# EAGLE board daughterboard (EAGLE 9.6.2), part 1 of 2
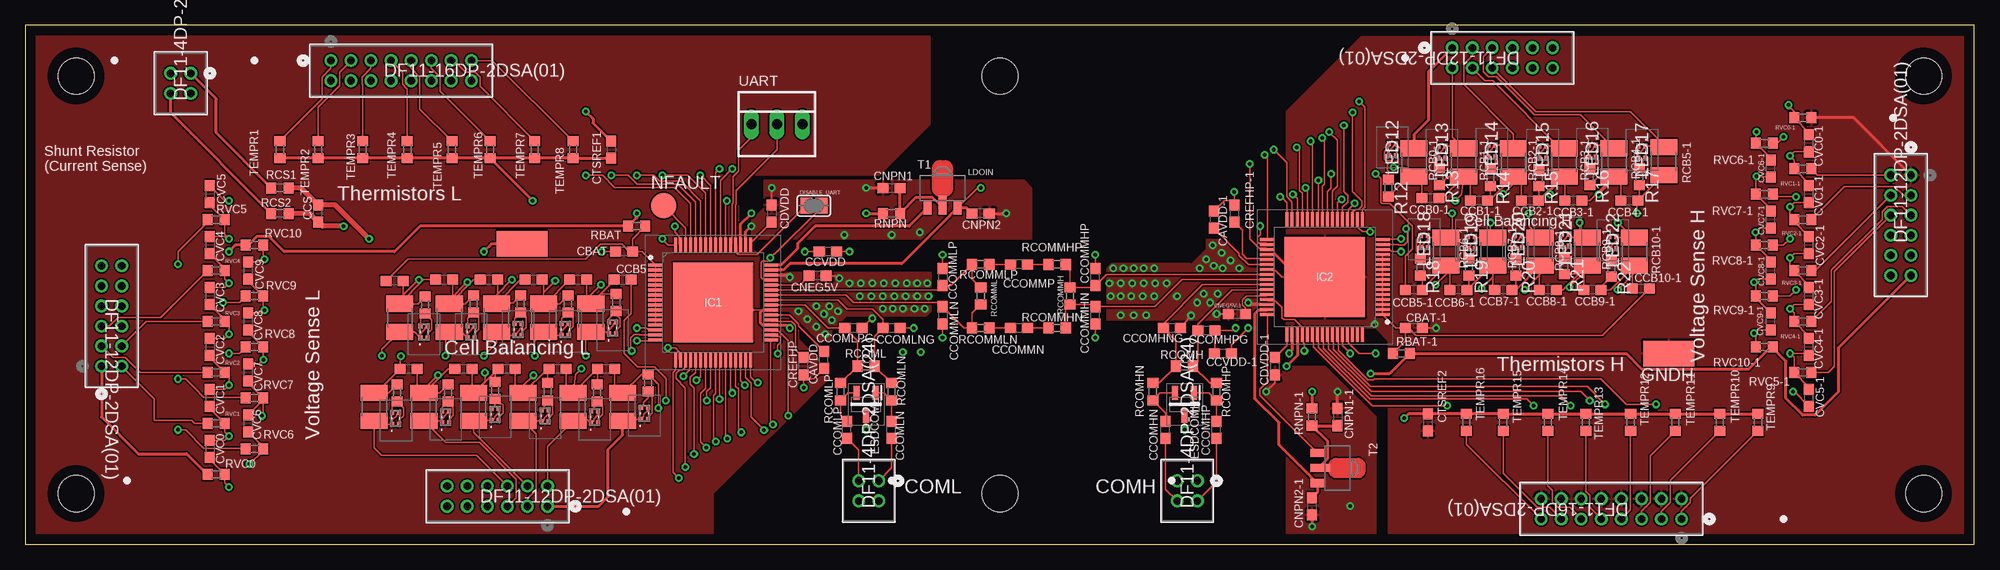
[diagram p0: board, top side]
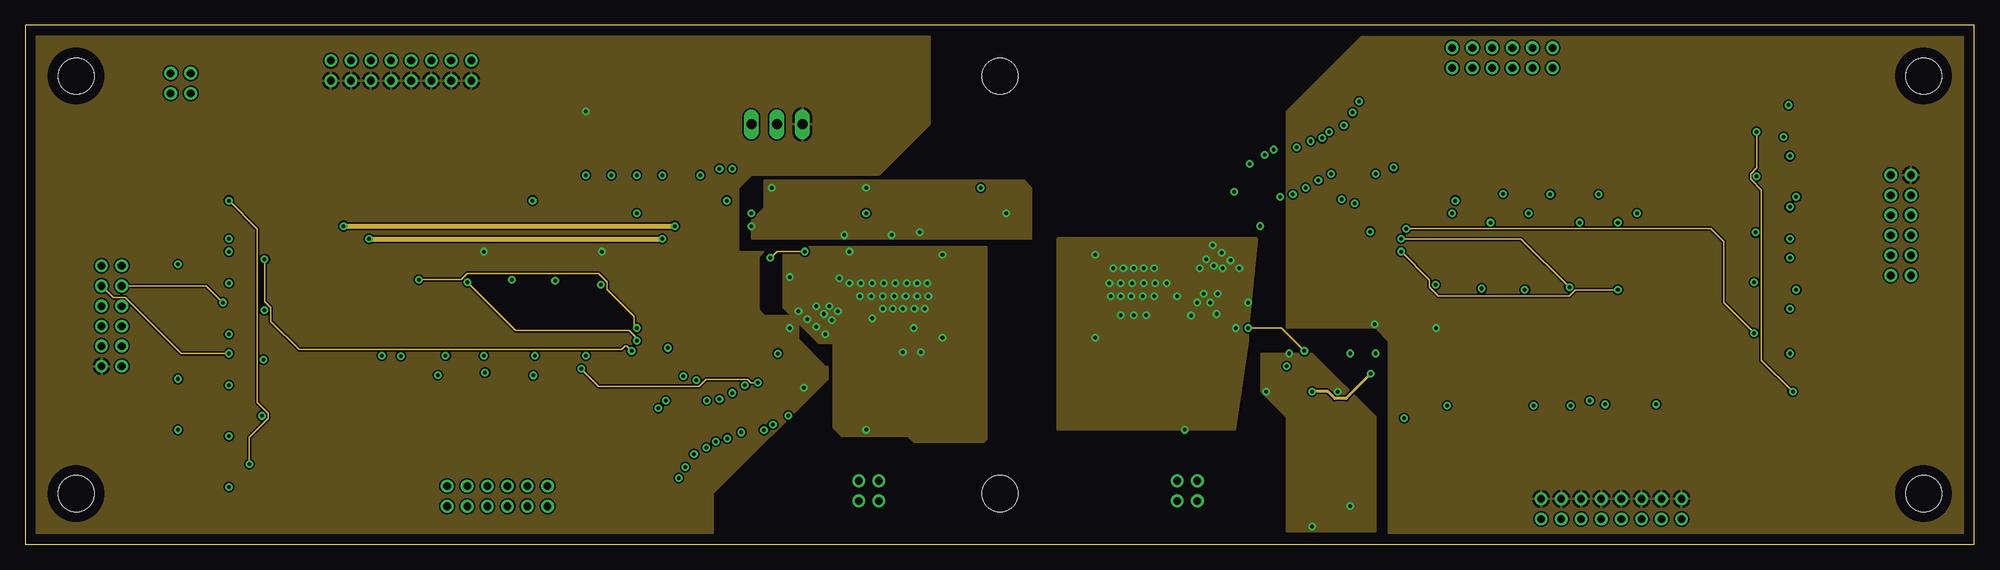
[diagram p1: board, inner layer Route2]
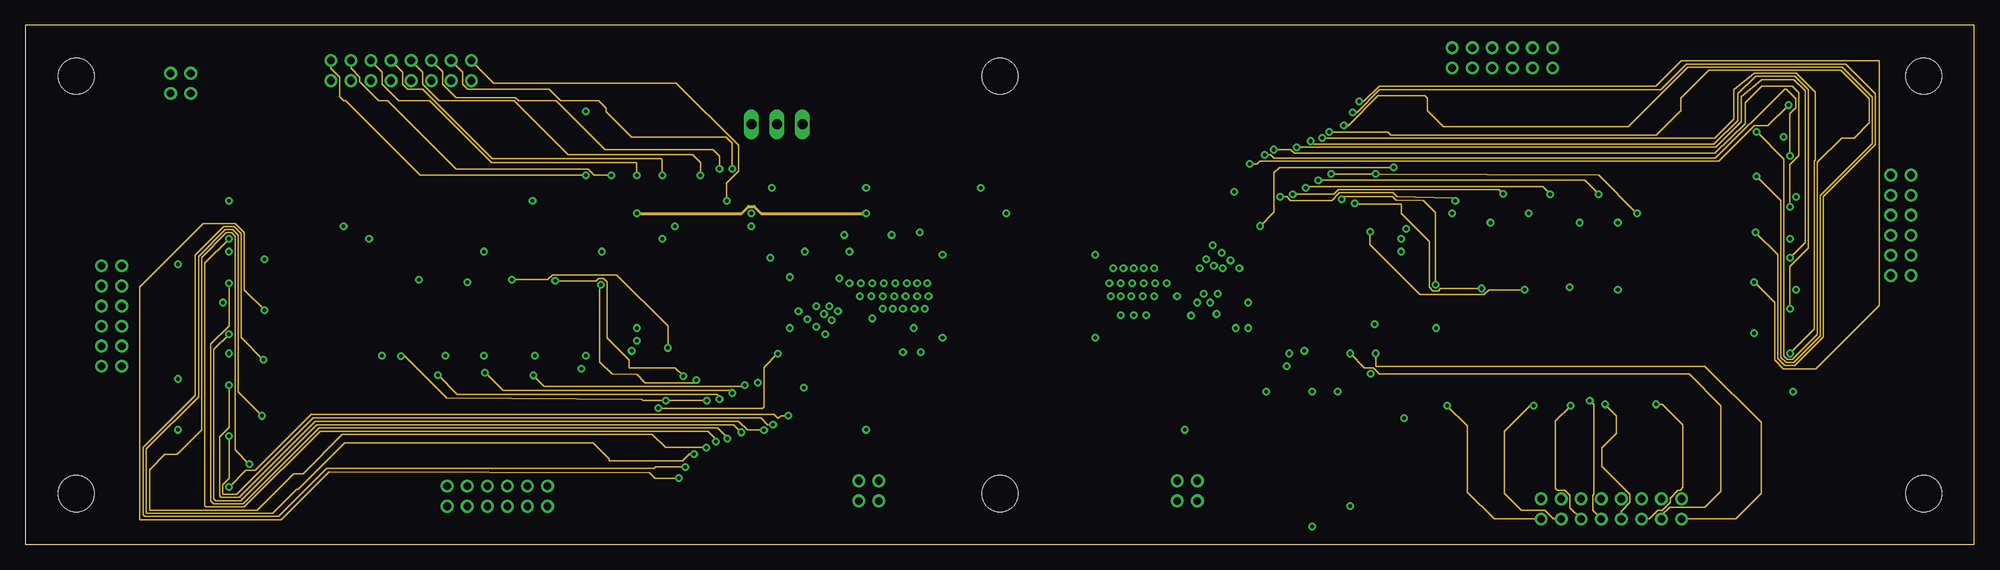
[diagram p2: board, inner layer Route15]
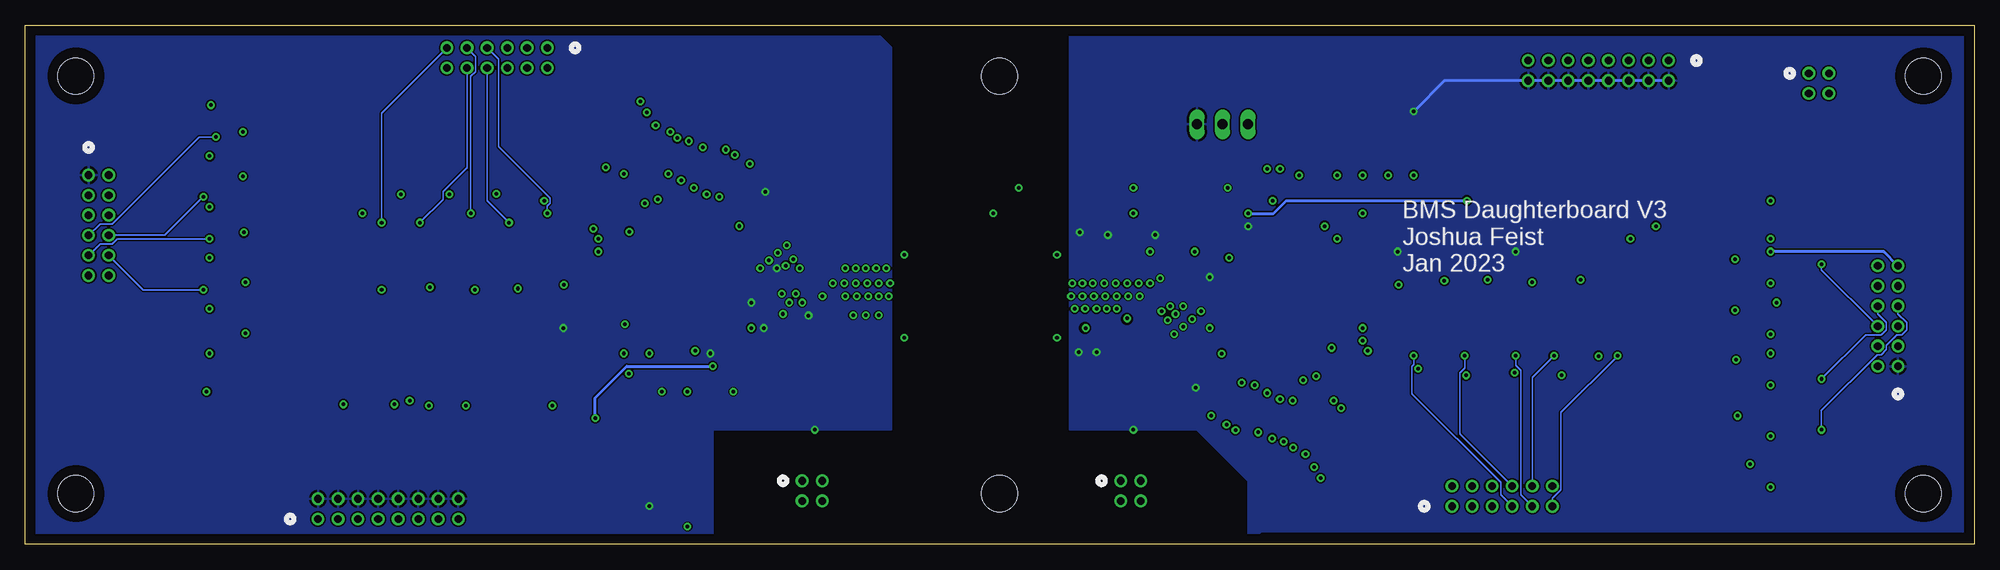
[diagram p3: board, bottom side, seen from below]

Size 194.29 x 51.8 mm. Coordinates in mm from the lower left corner, seen from the top.
Outline: 0,0 194.29,0 194.29,51.8 0,51.8 0,0
Copper layers (1+2*15+16): Top 0.035mm / dielectric 0.21mm / Route2 0.035mm / dielectric 1mm / Route15 0.035mm / dielectric 0.21mm / Bottom 0.035mm
Design rules "backup *": minimum track width 6mil, minimum drill 0.35mm, track to track 6mil, track to pad 6mil, pad to pad 6mil, via to via 6mil, smd to smd 6mil, copper to edge 40mil, drill to drill 6mil, minimum pad ring 10mil, minimum via ring 8mil, stop-mask expansion 4mil, vias tented up to drill 30mil, thermal gap 10mil
Holes 3.6 mm at 5.08,46.72 189.23,5.08 97.16,5.08 97.16,46.72 5.08,5.08 189.23,46.72
bRestrict: area 97.7,32.9 to 97.9,33.1; area 74.2,35.4 to 74.6,35.7; area 83.6,35.4 to 84,35.7; area 97.6,32.8 to 98,33.2; area 82,29 to 82.3,29.4; area 81,26.4 to 81.3,26.7; area 82,25.9 to 82.3,26.2; area 83.1,25.9 to 83.5,26.2; area 84.3,25.9 to 84.6,26.2; area 85.4,25.9 to 85.8,26.2; area 86.6,25.9 to 86.9,26.2; area 87.7,25.9 to 88.1,26.2; 62 more areas

## Footprints (pad centres in the part's own frame; a part is rotated, then mirrored left to right if it is on the bottom)
C0603 = smd 1.1 x 1: 1 -0.85,0; 2 0.85,0
CON4_2X2_UF_DF11_HIR = drill 0.762 pad 1.27: 1 0,0; 2 0,2.007; 3 -2.007,0; 4 -2.007,2.007
SJ = smd 1.168 x 1.6: 1 -0.762,0; 2 0.762,0
SOT95P255X150-3N = smd 1.4 x 0.6: 1 -1.15,0.95; 2 -1.15,-0.95; 3 1.15,0
SMD2,54-5,08 = smd 2.54 x 5.08: 1 0,0
QFP50P1200X1200X120-65N = smd 1.475 x 0.3: 1 -5.738,3.75; 2 -5.738,3.25; 3 -5.738,2.75; 4 -5.738,2.25; 5 -5.738,1.75; 6 -5.738,1.25; 7 -5.738,0.75; 8 -5.738,0.25; 9 -5.738,-0.25; 10 -5.738,-0.75; 11 -5.738,-1.25; 12 -5.738,-1.75; 13 -5.738,-2.25; 14 -5.738,-2.75; 15 -5.738,-3.25; 16 -5.738,-3.75; 33 5.738,-3.75; 34 5.738,-3.25; 35 5.738,-2.75; 36 5.738,-2.25; 37 5.738,-1.75; 38 5.738,-1.25; 39 5.738,-0.75; 40 5.738,-0.25; 41 5.738,0.25; 42 5.738,0.75; 43 5.738,1.25; 44 5.738,1.75; 45 5.738,2.25; 46 5.738,2.75; 47 5.738,3.25; 48 5.738,3.75 | smd 0.3 x 1.475: 17 -3.75,-5.738; 18 -3.25,-5.738; 19 -2.75,-5.738; 20 -2.25,-5.738; 21 -1.75,-5.738; 22 -1.25,-5.738; 23 -0.75,-5.738; 24 -0.25,-5.738; 25 0.25,-5.738; 26 0.75,-5.738; 27 1.25,-5.738; 28 1.75,-5.738; 29 2.25,-5.738; 30 2.75,-5.738; 31 3.25,-5.738; 32 3.75,-5.738; 49 3.75,5.738; 50 3.25,5.738; 51 2.75,5.738; 52 2.25,5.738; 53 1.75,5.738; 54 1.25,5.738; 55 0.75,5.738; 56 0.25,5.738; 57 -0.25,5.738; 58 -0.75,5.738; 59 -1.25,5.738; 60 -1.75,5.738; 61 -2.25,5.738; 62 -2.75,5.738; 63 -3.25,5.738; 64 -3.75,5.738 | smd 8 x 8: 65 0,0
CONN_DF11-16DP-2DSA(01)_HIR = drill 0.762 pad 1.27: 1 0,0; 2 0,-2.007; 3 2.007,0; 4 2.007,-2.007; 5 3.988,0; 6 3.988,-2.007; 7 5.994,0; 8 5.994,-2.007; 9 8.001,0; 10 8.001,-2.007; 11 10.008,0; 12 10.008,-2.007; 13 11.989,0; 14 11.989,-2.007; 15 13.995,0; 16 13.995,-2.007
APHB1608SGEC = smd 0.5 x 0.4: 1 0.6,-0.35; 2 -0.6,-0.35; 3 0.6,0.35; 4 -0.6,0.35
B2,54 = smd 2.54 x 2.54: TP 0,0
R0603 = smd 1 x 1.1: 1 -0.85,0; 2 0.85,0
R1210 = smd 1.6 x 2.7: 1 -1.4,0; 2 1.4,0
SOT89-BCE = smd 0.8 x 1.4: B -1.499,-1.981; E 1.499,-1.981 | smd 0.8 x 1.9: C 0,-1.727
22-23-2031 = drill 1 long: 1 -2.54,0; 2 0,0; 3 2.54,0
CON12_2X6_UF_DF11_HIR = drill 0.762 pad 1.27: 1 0,0; 2 0,2.007; 3 -2.007,0; 4 -2.007,2.007; 5 -3.988,0; 6 -3.988,2.007; 7 -5.994,0; 8 -5.994,2.007; 9 -8.001,0; 10 -8.001,2.007; 11 -10.008,0; 12 -10.008,2.007

## Placement (x,y rotation side)
CAVDD  1uf  [C0603]  79.63,18.41 90 top
CAVDD-1  1uf  [C0603]  118.49,32.38 270 top
CBAT  10 nf  [C0603]  59.69,29.21 0 top
CBAT-1  10 nf  [C0603]  138.43,21.59 180 top
CCB0  0.47uf  [C0603]  57.91,17.53 0 top
CCB0-1  0.47uf  [C0603]  140.08,34.54 180 top
CCB1  0.47uf  [C0603]  53.09,17.53 0 top
CCB1-1  0.47uf  [C0603]  144.91,34.29 180 top
CCB2  0.47uf  [C0603]  48.01,17.53 0 top
CCB2-1  0.47uf  [C0603]  149.99,34.29 180 top
CCB3  0.47uf  [C0603]  43.69,17.53 0 top
CCB3-1  0.47uf  [C0603]  154.31,34.29 180 top
CCB4  0.47uf  [C0603]  38.23,17.53 0 top
CCB4-1  0.47uf  [C0603]  159.89,34.29 180 top
CCB5  0.47uf  [C0603]  59.56,26.42 0 top
CCB5-1  0.47uf  [C0603]  138.43,25.4 180 top
CCB6  0.47uf  [C0603]  55.12,26.42 0 top
CCB6-1  0.47uf  [C0603]  142.88,25.4 180 top
CCB7  0.47uf  [C0603]  50.67,26.42 0 top
CCB7-1  0.47uf  [C0603]  147.32,25.4 180 top
CCB8  0.47uf  [C0603]  46.23,26.42 0 top
CCB8-1  0.47uf  [C0603]  151.77,25.4 180 top
CCB9  0.47uf  [C0603]  41.78,26.42 0 top
CCB9-1  0.47uf  [C0603]  156.21,25.4 180 top
CCB10  0.47uf  [C0603]  36.83,26.29 180 top
CCB10-1  0.47uf  [C0603]  161.04,25.53 0 top
CCOMHN  2.2nf  [C0603]  113.67,11.43 90 top
CCOMHNG  220pf  [C0603]  114.3,21.59 180 top
CCOMHP  2.2nf  [C0603]  118.75,11.43 90 top
CCOMHPG  220pf  [C0603]  117.73,21.34 180 top
CCOMLN  2.2nf  [C0603]  86.36,11.43 90 top
CCOMLNG  220pf  [C0603]  86.36,21.59 180 top
CCOMLP  2.2nf  [C0603]  81.92,11.43 90 top
CCOMLPG  220pf  [C0603]  82.55,21.59 180 top
CCOMMHN  220pf  [C0603]  106.68,22.86 90 top
CCOMMHP  220pf  [C0603]  106.68,26.67 90 top
CCOMMLN  220pf  [C0603]  91.44,22.86 270 top
CCOMMLP  220pf  [C0603]  91.44,26.67 270 top
CCOMMN  2.2nf  [C0603]  99.06,21.59 180 top
CCOMMP  2.2nf  [C0603]  99.06,27.94 180 top
CCS  0.47uf  [C0603]  29.21,33.02 90 top
CCVDD  4.7uf  [C0603]  80.01,29.21 180 top
CCVDD-1  4.7uf  [C0603]  119.38,19.05 0 top
CDVDD  1uf  [C0603]  74.42,33.02 270 top
CDVDD-1  1uf  [C0603]  124.59,17.78 90 top
CNEG5V  0.1uf  [C0603]  78.99,26.8 180 top
CNEG5V-1  0.1uf  [C0603]  120.78,22.99 0 top
CNPN1  0.22uf  [C0603]  86.36,35.56 0 top
CNPN1-1  0.22uf  [C0603]  130.81,12.7 270 top
CNPN2  0.1uf  [C0603]  95.25,33.02 180 top
CNPN2-1  0.1uf  [C0603]  128.27,3.81 90 top
COMH  DF11-4DP-2DSA(24)  [CON4_2X2_UF_DF11_HIR]  116.84,6.35 90 top
COML  DF11-4DP-2DSA(24)  [CON4_2X2_UF_DF11_HIR]  85.09,6.35 90 top
CREFHP  1uf  [C0603]  77.6,17.78 90 top
CREFHP-1  1uf  [C0603]  120.52,33.02 270 top
CTSREF1  1uf  [C0603]  58.42,39.37 270 top
CTSREF2  1uf  [C0603]  139.83,12.19 90 top
CVC0  0.47uf  [C0603]  18.41,9.53 270 top
CVC0-1  0.47uf  [C0603]  177.8,40.01 90 top
CVC1  0.47uf  [C0603]  18.41,14.61 270 top
CVC1-1  0.47uf  [C0603]  177.8,34.92 90 top
CVC2  0.47uf  [C0603]  18.41,19.68 270 top
CVC2-1  0.47uf  [C0603]  177.8,29.84 90 top
CVC3  0.47uf  [C0603]  18.41,24.77 270 top
CVC3-1  0.47uf  [C0603]  177.8,24.77 90 top
CVC4  0.47uf  [C0603]  18.41,29.84 270 top
CVC4-1  0.47uf  [C0603]  177.8,19.68 90 top
CVC5  0.47uf  [C0603]  18.41,34.92 270 top
CVC5-1  0.47uf  [C0603]  177.8,14.61 90 top
CVC6  0.47uf  [C0603]  22.23,12.06 270 top
CVC6-1  0.47uf  [C0603]  173.99,37.47 90 top
CVC7  0.47uf  [C0603]  22.23,17.14 270 top
CVC7-1  0.47uf  [C0603]  173.99,32.38 90 top
CVC8  0.47uf  [C0603]  22.23,22.23 270 top
CVC8-1  0.47uf  [C0603]  173.99,27.3 90 top
CVC9  0.47uf  [C0603]  22.23,27.3 270 top
CVC9-1  0.47uf  [C0603]  173.99,22.23 90 top
DISABLE_UART  Disable UART  [SJ]  78.61,33.78 180 top
ESDCOMH  ESDAVLC6-2BLY  [SOT95P255X150-3N]  115.57,13.97 270 top
ESDCOML  ESDAVLC6-2BLY  [SOT95P255X150-3N]  83.82,13.97 270 top
GNDH  [SMD2,54-5,08]  163.83,19.05 90 top
GNDL  [SMD2,54-5,08]  49.53,29.97 90 top
IC1  PBQ79656PAPTQ1  [QFP50P1200X1200X120-65N]  68.58,24.13 0 top
IC2  PBQ79656PAPTQ1  [QFP50P1200X1200X120-65N]  129.54,26.67 180 top
J1  DF11-16DP-2DSA(01)  [CONN_DF11-16DP-2DSA(01)_HIR]  30.48,48.26 0 top
J2  DF11-16DP-2DSA(01)  [CONN_DF11-16DP-2DSA(01)_HIR]  165.1,2.54 180 top
LED1  APHB1608SGEC  [APHB1608SGEC]  61.72,13.08 270 top
LED2  APHB1608SGEC  [APHB1608SGEC]  56.77,12.7 270 top
LED3  APHB1608SGEC  [APHB1608SGEC]  51.82,12.83 270 top
LED4  APHB1608SGEC  [APHB1608SGEC]  46.86,12.95 270 top
LED5  APHB1608SGEC  [APHB1608SGEC]  41.91,12.7 270 top
LED6  APHB1608SGEC  [APHB1608SGEC]  36.96,12.57 270 top
LED7  APHB1608SGEC  [APHB1608SGEC]  58.55,21.59 270 top
LED8  APHB1608SGEC  [APHB1608SGEC]  53.85,21.46 270 top
LED9  APHB1608SGEC  [APHB1608SGEC]  49.15,21.46 270 top
LED10  APHB1608SGEC  [APHB1608SGEC]  44.45,21.21 270 top
LED11  APHB1608SGEC  [APHB1608SGEC]  39.75,21.21 270 top
LED12  APHB1608SGEC  [APHB1608SGEC]  136.27,39.37 90 top
LED13  APHB1608SGEC  [APHB1608SGEC]  141.22,39.12 90 top
LED14  APHB1608SGEC  [APHB1608SGEC]  146.18,39.24 90 top
LED15  APHB1608SGEC  [APHB1608SGEC]  151.26,39.12 90 top
LED16  APHB1608SGEC  [APHB1608SGEC]  156.21,39.24 90 top
LED17  APHB1608SGEC  [APHB1608SGEC]  161.16,39.12 90 top
LED18  APHB1608SGEC  [APHB1608SGEC]  139.45,30.23 90 top
LED19  APHB1608SGEC  [APHB1608SGEC]  144.15,30.1 90 top
LED20  APHB1608SGEC  [APHB1608SGEC]  148.84,30.23 90 top
LED21  APHB1608SGEC  [APHB1608SGEC]  153.54,30.35 90 top
LED22  APHB1608SGEC  [APHB1608SGEC]  158.24,30.1 90 top
NFAULT  TPB2,54  [B2,54]  63.63,33.78 0 top
R1  150  [R0603]  62.1,16.13 90 top
R2  150  [R0603]  57.02,15.11 90 top
R3  150  [R0603]  52.07,15.24 90 top
R4  150  [R0603]  46.86,15.37 90 top
R5  150  [R0603]  42.16,15.11 90 top
R6  150  [R0603]  37.08,15.11 90 top
R7  150  [R0603]  58.93,24.13 90 top
R8  150  [R0603]  54.1,24 90 top
R9  150  [R0603]  49.4,24 90 top
R10  150  [R0603]  44.7,24 90 top
R11  150  [R0603]  39.88,23.88 90 top
R12  150  [R0603]  135.89,35.56 270 top
R13  150  [R0603]  140.97,36.7 270 top
R14  150  [R0603]  146.05,36.58 270 top
R15  150  [R0603]  150.88,36.58 270 top
R16  150  [R0603]  155.96,36.7 270 top
R17  150  [R0603]  160.91,36.7 270 top
R18  150  [R0603]  139.06,27.69 270 top
R19  150  [R0603]  143.89,27.69 270 top
R20  150  [R0603]  148.59,27.69 270 top
R21  150  [R0603]  153.42,27.81 270 top
R22  150  [R0603]  158.12,27.56 270 top
RBAT  30  [R0603]  60.96,31.75 180 top
RBAT-1  30  [R0603]  137.16,19.05 0 top
RCB0  10  [R1210]  59.56,13.72 90 top
RCB0-1  10  [R1210]  138.43,38.1 270 top
RCB1  10  [R1210]  54.61,13.72 90 top
RCB1-1  10  [R1210]  143.38,38.1 270 top
RCB2  10  [R1210]  49.66,13.72 90 top
RCB2-1  10  [R1210]  148.34,38.1 270 top
RCB3  10  [R1210]  44.7,13.72 90 top
RCB3-1  10  [R1210]  153.42,38.1 270 top
RCB4  10  [R1210]  39.75,13.72 90 top
RCB4-1  10  [R1210]  158.37,38.1 270 top
RCB5  10  [R1210]  34.8,13.72 90 top
RCB5-1  10  [R1210]  163.32,38.23 270 top
RCB6  10  [R1210]  56.39,22.61 90 top
RCB6-1  10  [R1210]  141.61,29.21 270 top
RCB7  10  [R1210]  51.69,22.61 90 top
RCB7-1  10  [R1210]  146.3,29.21 270 top
RCB8  10  [R1210]  46.99,22.61 90 top
RCB8-1  10  [R1210]  151,29.21 270 top
RCB9  10  [R1210]  42.29,22.61 90 top
RCB9-1  10  [R1210]  155.7,29.21 270 top
RCB10  10  [R1210]  37.34,22.61 90 top
RCB10-1  10  [R1210]  160.4,29.21 270 top
RCOMH  1k  [R0603]  115.57,17.78 180 top
RCOMHN  49  [R0603]  112.4,15.24 90 top
RCOMHP  49  [R0603]  118.75,15.24 90 top
RCOML  1k  [R0603]  83.82,17.78 180 top
RCOMLN  49  [R0603]  86.36,15.24 90 top
RCOMLP  49  [R0603]  81.28,15.24 90 top
RCOMMH  1k  [R0603]  104.14,24.77 90 top
RCOMMHN  49  [R0603]  102.87,21.59 0 top
RCOMMHP  49  [R0603]  102.87,27.94 0 top
RCOMML  1k  [R0603]  95.25,24.77 270 top
RCOMMLN  49  [R0603]  95.25,21.59 180 top
RCOMMLP  49  [R0603]  95.25,27.94 180 top
RCS1  10  [R0603]  25.4,35.56 0 top
RCS2  10  [R0603]  25.4,33.02 0 top
RNPN  49  [R0603]  86.36,33.02 180 top
RNPN-1  49  [R0603]  128.27,12.7 90 top
RVC0  100  [R0603]  19.05,6.99 0 top
RVC0-1  100  [R0603]  177.16,42.55 180 top
RVC1  100  [R0603]  19.05,12.06 0 top
RVC1-1  100  [R0603]  177.16,37.47 180 top
RVC2  100  [R0603]  19.05,17.14 0 top
RVC2-1  100  [R0603]  177.16,32.38 180 top
RVC3  100  [R0603]  19.05,22.23 0 top
RVC3-1  100  [R0603]  177.16,27.3 180 top
RVC4  100  [R0603]  19.05,27.3 0 top
RVC4-1  100  [R0603]  177.16,22.23 180 top
RVC5  100  [R0603]  19.05,32.38 0 top
RVC5-1  100  [R0603]  177.16,17.14 180 top
RVC6  100  [R0603]  22.86,9.53 0 top
RVC6-1  100  [R0603]  173.36,40.01 180 top
RVC7  100  [R0603]  22.86,14.61 0 top
RVC7-1  100  [R0603]  173.36,34.92 180 top
RVC8  100  [R0603]  22.86,19.68 0 top
RVC8-1  100  [R0603]  173.36,29.84 180 top
RVC9  100  [R0603]  22.86,24.77 0 top
RVC9-1  100  [R0603]  173.36,24.77 180 top
RVC10  100  [R0603]  22.86,29.84 0 top
RVC10-1  100  [R0603]  173.36,19.68 180 top
SR  DF11-4DP-2DSA(24)  [CON4_2X2_UF_DF11_HIR]  16.51,46.99 90 top
T1  PBHV8115X, 115  [SOT89-BCE]  91.44,35.56 0 top
T2  PBHV8115X, 115  [SOT89-BCE]  130.81,7.62 270 top
TEMPR1  10k  [R0603]  25.4,39.37 90 top
TEMPR2  10k  [R0603]  29.21,39.37 90 top
TEMPR3  10k  [R0603]  33.66,39.37 90 top
TEMPR4  10k  [R0603]  38.1,39.37 90 top
TEMPR5  10k  [R0603]  42.55,39.37 90 top
TEMPR6  10k  [R0603]  46.35,39.37 90 top
TEMPR7  10k  [R0603]  50.8,39.37 90 top
TEMPR8  10k  [R0603]  54.61,39.37 90 top
TEMPR9  10k  [R0603]  172.72,12.19 270 top
TEMPR10  10k  [R0603]  168.91,12.19 270 top
TEMPR11  10k  [R0603]  164.47,12.19 270 top
TEMPR12  10k  [R0603]  160.02,12.19 270 top
TEMPR13  10k  [R0603]  155.58,12.19 270 top
TEMPR14  10k  [R0603]  151.77,12.19 270 top
TEMPR15  10k  [R0603]  147.32,12.19 270 top
TEMPR16  10k  [R0603]  143.64,12.19 270 top
UART  22-23-2031  [22-23-2031]  74.93,41.91 0 top
VCL  DF11-12DP-2DSA(01)  [CON12_2X6_UF_DF11_HIR]  7.62,17.78 270 top
VCL1  DF11-12DP-2DSA(01)  [CON12_2X6_UF_DF11_HIR]  52.07,3.81 0 top
VCL2  DF11-12DP-2DSA(01)  [CON12_2X6_UF_DF11_HIR]  187.96,36.83 90 top
VCL3  DF11-12DP-2DSA(01)  [CON12_2X6_UF_DF11_HIR]  142.24,49.53 180 top

## Library data of the parts
CAVDD CAVDD-1 CBAT CBAT-1 CCB0 CCB0-1 CCB1 CCB1-1 CCB2 CCB2-1 CCB3 CCB3-1 CCB4 CCB4-1 CCB5 CCB5-1 CCB6 CCB6-1 CCB7 CCB7-1 CCB8 CCB8-1 CCB9 CCB9-1 CCB10 CCB10-1 CCOMHN CCOMHNG CCOMHP CCOMHPG CCOMLN CCOMLNG CCOMLP CCOMLPG CCOMMHN CCOMMHP CCOMMLN CCOMMLP CCOMMN CCOMMP CCS CCVDD CCVDD-1 CDVDD CDVDD-1 CNEG5V CNEG5V-1 CNPN1 CNPN1-1 CNPN2 CNPN2-1 CREFHP CREFHP-1 CTSREF1 CTSREF2 CVC0 CVC0-1 CVC1 CVC1-1 CVC2 CVC2-1 CVC3 CVC3-1 CVC4 CVC4-1 CVC5 CVC5-1 CVC6 CVC6-1 CVC7 CVC7-1 CVC8 CVC8-1 CVC9 CVC9-1 = rcl; SPICEPREFIX: C
COMH COML SR = hirose_connectors; COPYRIGHT: Copyright (C) 2023 Ultra Librarian. All rights reserved.; DIGI-KEY_PART_NUMBER_1: H10229-ND; MANUFACTURER_PART_NUMBER: DF11-4DP-2DSA(24); MFR_NAME: Hirose
DISABLE_UART = jumper
ESDCOMH ESDCOML = ESDAVLC6-2BLY; DESCRIPTION: STMICROELECTRONICS - ESDAVLC6-2BLY - ESD Protection Device, 17 V, SOT-23, 3 Pins, 5 V, 140 W, ESDA Transil Series; HEIGHT: 1.5mm; MANUFACTURER_NAME: STMicroelectronics; MANUFACTURER_PART_NUMBER: ESDAVLC6-2BLY; MOUSER_PART_NUMBER: 511-ESDAVLC6-2BLY; MOUSER_PRICE-STOCK: https://www.mouser.co.uk/ProductDetail/STMicroelectronics/ESDAVLC6-2BLY?qs=l7cgNqFNU1iH2e21evvYsA%3D%3D
GNDH GNDL = wirepad
IC1 IC2 = PBQ79656PAPTQ1; DESCRIPTION: BQ7965x-Q1 Family of 12S, 14S, 16S Precision Automotive Battery Monitor, Balancer and Integrated Hardware Protector with up to SafeTITM-26262 ASIL-D Compliance; HEIGHT: 1.2mm; MANUFACTURER_NAME: Texas Instruments; MANUFACTURER_PART_NUMBER: PBQ79656PAPTQ1
J1 J2 = hirose_connectors; COPYRIGHT: Copyright (C) 2023 Ultra Librarian. All rights reserved.; MANUFACTURER_PART_NUMBER: DF11-16DP-2DSA(01); MFR_NAME: Hirose
LED1-LED22 = APHB1608SGEC; DESCRIPTION: Standard LEDs - SMD Grn/Red 15/15mcd 568/625nm Water Clr; HEIGHT: 0.65mm; MANUFACTURER_NAME: Kingbright; MANUFACTURER_PART_NUMBER: APHB1608SGEC; MOUSER_PART_NUMBER: 604-APHB1608SGEC; MOUSER_PRICE-STOCK: https://www.mouser.co.uk/ProductDetail/Kingbright/APHB1608SGEC?qs=WZYOKEqGBpLhrRIHB2dNew%3D%3D
NFAULT = testpad
R1-R22 RBAT RBAT-1 RCB0 RCB0-1 RCB1 RCB1-1 RCB2 RCB2-1 RCB3 RCB3-1 RCB4 RCB4-1 RCB5 RCB5-1 RCB6 RCB6-1 RCB7 RCB7-1 RCB8 RCB8-1 RCB9 RCB9-1 RCB10 RCB10-1 RCOMH RCOMHN RCOMHP RCOML RCOMLN RCOMLP RCOMMH RCOMMHN RCOMMHP RCOMML RCOMMLN RCOMMLP RCS1 RCS2 RNPN RNPN-1 RVC0 RVC0-1 RVC1 RVC1-1 RVC2 RVC2-1 RVC3 RVC3-1 RVC4 RVC4-1 RVC5 RVC5-1 RVC6 RVC6-1 RVC7 RVC7-1 RVC8 RVC8-1 RVC9 RVC9-1 RVC10 RVC10-1 TEMPR1-TEMPR16 = rcl; SPICEPREFIX: R
T1 T2 = transistor
UART = con-molex; MF: MOLEX; MPN: 22-23-2031; OC_FARNELL: 1462950; OC_NEWARK: 30C0862
VCL VCL1-VCL3 = hirose_connectors; COPYRIGHT: Copyright (C) 2023 Ultra Librarian. All rights reserved.; MANUFACTURER_PART_NUMBER: DF11-12DP-2DSA(01); MFR_NAME: Hirose

## Nets
BATC: RBAT.2 RNPN.2 RVC10.1 VCL.11
BATC-1: RBAT-1.2 RNPN-1.2 RVC10-1.1 VCL2.11
CB0: CCB0.2 IC1.34 R1.2 RCB0.2
CB0-1: CCB0-1.2 IC2.34 R12.2 RCB0-1.2
CB0-IN: LED1.1 LED1.4 RCB0.1 VCL1.1
CB0-IN-1: LED12.1 LED12.4 RCB0-1.1 VCL3.1
CB1: CCB0.1 CCB1.2 IC1.32 R2.2 RCB1.2
CB1-1: CCB0-1.1 CCB1-1.2 IC2.32 R13.2 RCB1-1.2
CB1-IN: LED2.1 LED2.4 RCB1.1 VCL1.2
CB1-IN-1: LED13.1 LED13.4 RCB1-1.1 VCL3.2
CB2: CCB1.1 CCB2.2 IC1.30 R3.2 RCB2.2
CB2-1: CCB1-1.1 CCB2-1.2 IC2.30 R14.2 RCB2-1.2
CB2-IN: LED3.1 LED3.4 RCB2.1 VCL1.3
CB2-IN-1: LED14.1 LED14.4 RCB2-1.1 VCL3.3
CB3: CCB2.1 CCB3.2 IC1.28 R4.2 RCB3.2
CB3-1: CCB2-1.1 CCB3-1.2 IC2.28 R15.2 RCB3-1.2
CB3-IN: LED4.1 LED4.4 RCB3.1 VCL1.4
CB3-IN-1: LED15.1 LED15.4 RCB3-1.1 VCL3.4
CB4: CCB3.1 CCB4.2 IC1.26 R5.2 RCB4.2
CB4-1: CCB3-1.1 CCB4-1.2 IC2.26 R16.2 RCB4-1.2
CB4-IN: LED5.1 LED5.4 RCB4.1 VCL1.5
CB4-IN-1: LED16.1 LED16.4 RCB4-1.1 VCL3.5
CB5: CCB4.1 CCB5.2 IC1.24 R6.2 RCB5.2
CB5-1: CCB4-1.1 CCB5-1.2 IC2.24 R17.2 RCB5-1.2
CB5-IN: LED6.1 LED6.4 RCB5.1 VCL1.6
CB5-IN-1: LED17.1 LED17.4 RCB5-1.1 VCL3.6
CB6: CCB5.1 CCB6.2 IC1.22 R7.2 RCB6.2
CB6-1: CCB5-1.1 CCB6-1.2 IC2.22 R18.2 RCB6-1.2
CB6-IN: LED7.1 LED7.4 RCB6.1 VCL1.7
CB6-IN-1: LED18.1 LED18.4 RCB6-1.1 VCL3.7
CB7: CCB6.1 CCB7.2 IC1.20 R8.2 RCB7.2
CB7-1: CCB6-1.1 CCB7-1.2 IC2.20 R19.2 RCB7-1.2
CB7-IN: LED8.1 LED8.4 RCB7.1 VCL1.8
CB7-IN-1: LED19.1 LED19.4 RCB7-1.1 VCL3.8
CB8: CCB7.1 CCB8.2 IC1.18 R9.2 RCB8.2
CB8-1: CCB7-1.1 CCB8-1.2 IC2.18 R20.2 RCB8-1.2
CB8-IN: LED9.1 LED9.4 RCB8.1 VCL1.9
CB8-IN-1: LED20.1 LED20.4 RCB8-1.1 VCL3.9
CB9: CCB8.1 CCB9.2 IC1.16 R10.2 RCB9.2
CB9-1: CCB8-1.1 CCB9-1.2 IC2.16 R21.2 RCB9-1.2
CB9-IN: LED10.1 LED10.4 RCB9.1 VCL1.10
CB9-IN-1: LED21.1 LED21.4 RCB9-1.1 VCL3.10
CB10: CCB9.1 CCB10.1 IC1.14 R11.2 RCB10.2
CB10-1: CCB9-1.1 CCB10-1.1 IC2.14 R22.2 RCB10-1.2
CB10-IN: LED11.1 LED11.4 RCB10.1 VCL1.11
CB10-IN-1: LED22.1 LED22.4 RCB10-1.1 VCL3.11
COMHN: CCOMHN.1 COMH.4
COMHP: CCOMHP.1 COMH.3
COMLN: CCOMLN.1 COML.1
COMLP: CCOMLP.1 COML.2
COMMN: CCOMMN.1 RCOMMHN.1
COMMP: CCOMMP.1 RCOMMHP.1
CVDD: CCVDD.2 DISABLE_UART.1 IC1.45
CVDD-1: CCVDD-1.2 IC2.45 IC2.52
GNDH: CAVDD-1.1 CBAT-1.1 CCOMHNG.1 CCOMHPG.1 CCOMMHN.1 CCOMMHP.2 CCVDD-1.1 CDVDD-1.1 CNEG5V-1.1 CNPN1-1.1 CNPN2-1.1 CREFHP-1.1 CTSREF2.1 ESDCOMH.3 GNDH.1 IC2.36 IC2.39 IC2.46 IC2.50 IC2.65 J2.2 J2.4 J2.6 J2.8 J2.10 J2.12 J2.14 J2.16 RVC0-1.1 VCL2.1
GNDL: CAVDD.1 CBAT.1 CCOMLNG.1 CCOMLPG.1 CCOMMLN.2 CCOMMLP.1 CCVDD.1 CDVDD.1 CNEG5V.1 CNPN1.1 CNPN2.1 CREFHP.1 CTSREF1.1 ESDCOML.3 GNDL.1 IC1.36 IC1.39 IC1.46 IC1.50 IC1.65 J1.2 J1.4 J1.6 J1.8 J1.10 J1.12 J1.14 J1.16 RVC0.1 UART.3 VCL.1
LDOIN: CNPN2.2 IC1.47 T1.E
LDOIN-1: CNPN2-1.2 IC2.47 T2.E
N$1: CCOMHP.2 ESDCOMH.1 RCOMHP.1
N$2: CCOMHN.2 ESDCOMH.2 RCOMHN.1
N$3: DISABLE_UART.2 IC1.52 UART.2
N$4: CCS.2 IC1.64 RCS1.2
N$5: LED12.2 LED12.3 R12.1
N$6: LED2.2 LED2.3 R2.1
N$7: CCS.1 IC1.63 RCS2.2
N$8: LED13.2 LED13.3 R13.1
N$9: IC1.53 UART.1
N$10: IC1.62 NFAULT.TP
N$11: LED14.2 LED14.3 R14.1
N$12: LED3.2 LED3.3 R3.1
N$13: RCS1.1 SR.1
N$14: LED15.2 LED15.3 R15.1
N$15: LED16.2 LED16.3 R16.1
N$16: RCS2.1 SR.4
N$17: LED17.2 LED17.3 R17.1
N$18: LED4.2 LED4.3 R4.1
N$19: LED18.2 LED18.3 R18.1
N$20: LED19.2 LED19.3 R19.1
N$21: LED5.2 LED5.3 R5.1
N$22: LED20.2 LED20.3 R20.1
N$23: LED21.2 LED21.3 R21.1
N$24: LED6.2 LED6.3 R6.1
N$25: LED22.2 LED22.3 R22.1
N$27: LED7.2 LED7.3 R7.1
N$29: CCOMLNG.2 IC1.41 RCOML.1 RCOMLN.2
N$31: LED8.2 LED8.3 R8.1
N$33: CREFHP.2 IC1.37
N$35: LED9.2 LED9.3 R9.1
N$38: LED10.2 LED10.3 R10.1
N$41: LED11.2 LED11.3 R11.1
N$43: LED1.2 LED1.3 R1.1
N$46: CAVDD.2 IC1.38
N$48: CNEG5V.2 IC1.44
N$49: CCOMLPG.2 IC1.40 RCOML.2 RCOMLP.2
N$50: CDVDD.2 IC1.49
N$59: CCOMMLN.1 IC1.42 RCOMML.2 RCOMMLN.2
N$60: CCOMMLP.2 IC1.43 RCOMML.1 RCOMMLP.2
N$61: CCOMMN.2 RCOMMLN.1
N$62: CCOMMP.2 RCOMMLP.1
N$65: CNPN1.2 RNPN.1 T1.C
N$67: CCOMLP.2 ESDCOML.2 RCOMLP.1
N$68: CCOMLN.2 ESDCOML.1 RCOMLN.1
N$111: CREFHP-1.2 IC2.37
N$112: CAVDD-1.2 IC2.38
N$113: CNEG5V-1.2 IC2.44
N$114: CDVDD-1.2 IC2.49
N$125: CCOMMHN.2 IC2.41 RCOMMH.1 RCOMMHN.2
N$126: CCOMMHP.1 IC2.40 RCOMMH.2 RCOMMHP.2
N$130: CNPN1-1.2 RNPN-1.1 T2.C
N$131: CCOMHPG.2 IC2.43 RCOMH.1 RCOMHP.2
N$132: CCOMHNG.2 IC2.42 RCOMH.2 RCOMHN.2
NPNB: IC1.48 T1.B
NPNB-1: IC2.48 T2.B
TEMP1: IC1.61 J1.1 TEMPR1.2
TEMP2: IC1.60 J1.3 TEMPR2.2
TEMP3: IC1.59 J1.5 TEMPR3.2
TEMP4: IC1.58 J1.7 TEMPR4.2
TEMP5: IC1.57 J1.9 TEMPR5.2
TEMP6: IC1.56 J1.11 TEMPR6.2
TEMP7: IC1.55 J1.13 TEMPR7.2
TEMP8: IC1.54 J1.15 TEMPR8.2
TEMP9: IC2.61 J2.1 TEMPR9.2
TEMP10: IC2.60 J2.3 TEMPR10.2
TEMP11: IC2.59 J2.5 TEMPR11.2
TEMP12: IC2.58 J2.7 TEMPR12.2
TEMP13: IC2.57 J2.9 TEMPR13.2
TEMP14: IC2.56 J2.11 TEMPR14.2
TEMP15: IC2.55 J2.13 TEMPR15.2
TEMP16: IC2.54 J2.15 TEMPR16.2
TSREF: CTSREF1.2 IC1.51 TEMPR1.1 TEMPR2.1 TEMPR3.1 TEMPR4.1 TEMPR5.1 TEMPR6.1 TEMPR7.1 TEMPR8.1
TSREF-1: CTSREF2.2 IC2.51 TEMPR9.1 TEMPR10.1 TEMPR11.1 TEMPR12.1 TEMPR13.1 TEMPR14.1 TEMPR15.1 TEMPR16.1
VC0: CVC0.2 IC1.35 RVC0.2
VC0-1: CVC0-1.2 IC2.35 RVC0-1.2
VC1: CVC0.1 CVC1.2 IC1.33 RVC1.2
VC1-1: CVC0-1.1 CVC1-1.2 IC2.33 RVC1-1.2
VC1-IN: RVC1.1 VCL.2
VC1-IN-1: RVC1-1.1 VCL2.2
VC2: CVC1.1 CVC2.2 IC1.31 RVC2.2
VC2-1: CVC1-1.1 CVC2-1.2 IC2.31 RVC2-1.2
VC2-IN: RVC2.1 VCL.3
VC2-IN-1: RVC2-1.1 VCL2.3
VC3: CVC2.1 CVC3.2 IC1.29 RVC3.2
VC3-1: CVC2-1.1 CVC3-1.2 IC2.29 RVC3-1.2
VC3-IN: RVC3.1 VCL.4
VC3-IN-1: RVC3-1.1 VCL2.4
VC4: CVC3.1 CVC4.2 IC1.27 RVC4.2
VC4-1: CVC3-1.1 CVC4-1.2 IC2.27 RVC4-1.2
VC4-IN: RVC4.1 VCL.5
VC4-IN-1: RVC4-1.1 VCL2.5
VC5: CVC4.1 CVC5.2 IC1.25 RVC5.2
VC5-1: CVC4-1.1 CVC5-1.2 IC2.25 RVC5-1.2
VC5-IN: RVC5.1 VCL.6
VC5-IN-1: RVC5-1.1 VCL2.6
VC6: CVC5.1 CVC6.2 IC1.23 RVC6.2
VC6-1: CVC5-1.1 CVC6-1.2 IC2.23 RVC6-1.2
VC6-IN: RVC6.1 VCL.7
VC6-IN-1: RVC6-1.1 VCL2.7
VC7: CVC6.1 CVC7.2 IC1.21 RVC7.2
VC7-1: CVC6-1.1 CVC7-1.2 IC2.21 RVC7-1.2
VC7-IN: RVC7.1 VCL.8
VC7-IN-1: RVC7-1.1 VCL2.8
VC8: CVC7.1 CVC8.2 IC1.19 RVC8.2
VC8-1: CVC7-1.1 CVC8-1.2 IC2.19 RVC8-1.2
VC8-IN: RVC8.1 VCL.9
VC8-IN-1: RVC8-1.1 VCL2.9
VC9: CVC8.1 CVC9.2 IC1.17 RVC9.2
VC9-1: CVC8-1.1 CVC9-1.2 IC2.17 RVC9-1.2
VC9-IN: RVC9.1 VCL.10
VC9-IN-1: RVC9-1.1 VCL2.10
VC10: CVC9.1 IC1.15 RVC10.2
VC10-1: CVC9-1.1 IC2.15 RVC10-1.2
VC_CB_HIGH: CBAT.2 CCB10.2 IC1.1 IC1.2 IC1.3 IC1.4 IC1.5 IC1.6 IC1.7 IC1.8 IC1.9 IC1.10 IC1.11 IC1.12 IC1.13 RBAT.1
VC_CB_HIGH-1: CBAT-1.2 CCB10-1.2 IC2.1 IC2.2 IC2.3 IC2.4 IC2.5 IC2.6 IC2.7 IC2.8 IC2.9 IC2.10 IC2.11 IC2.12 IC2.13 RBAT-1.1